# Altium PCB fscv8ch.PCBDOC
Units mil, origin at the board's own origin, x right, y up, seen from the top; angles counter-clockwise.
Board outline 6000 x 4000 mil, 3 copper layers (Top Layer, MidLayer1, Bottom Layer); 30 components, 26 nets, 110 pads, 52 vias.
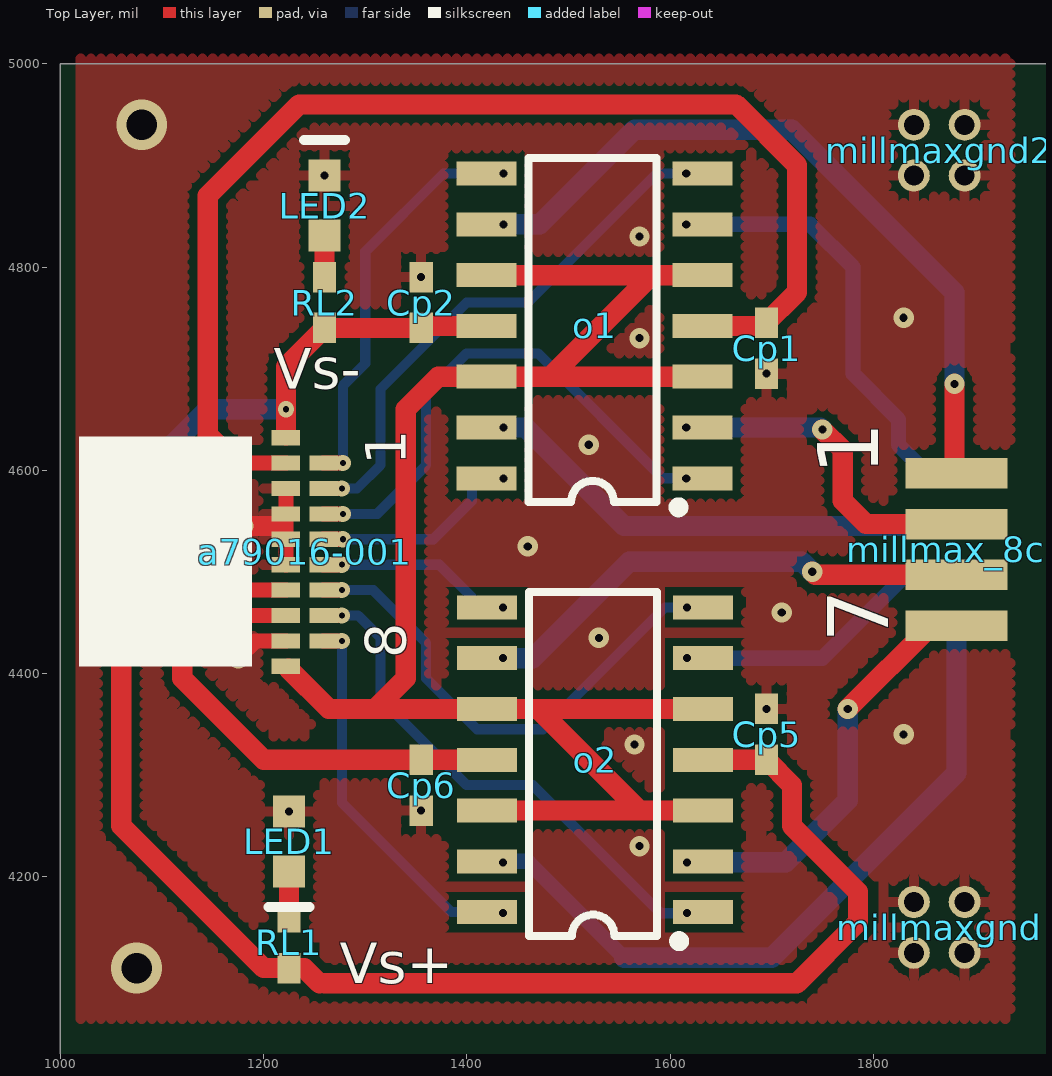
[diagram p0: Top Layer view]
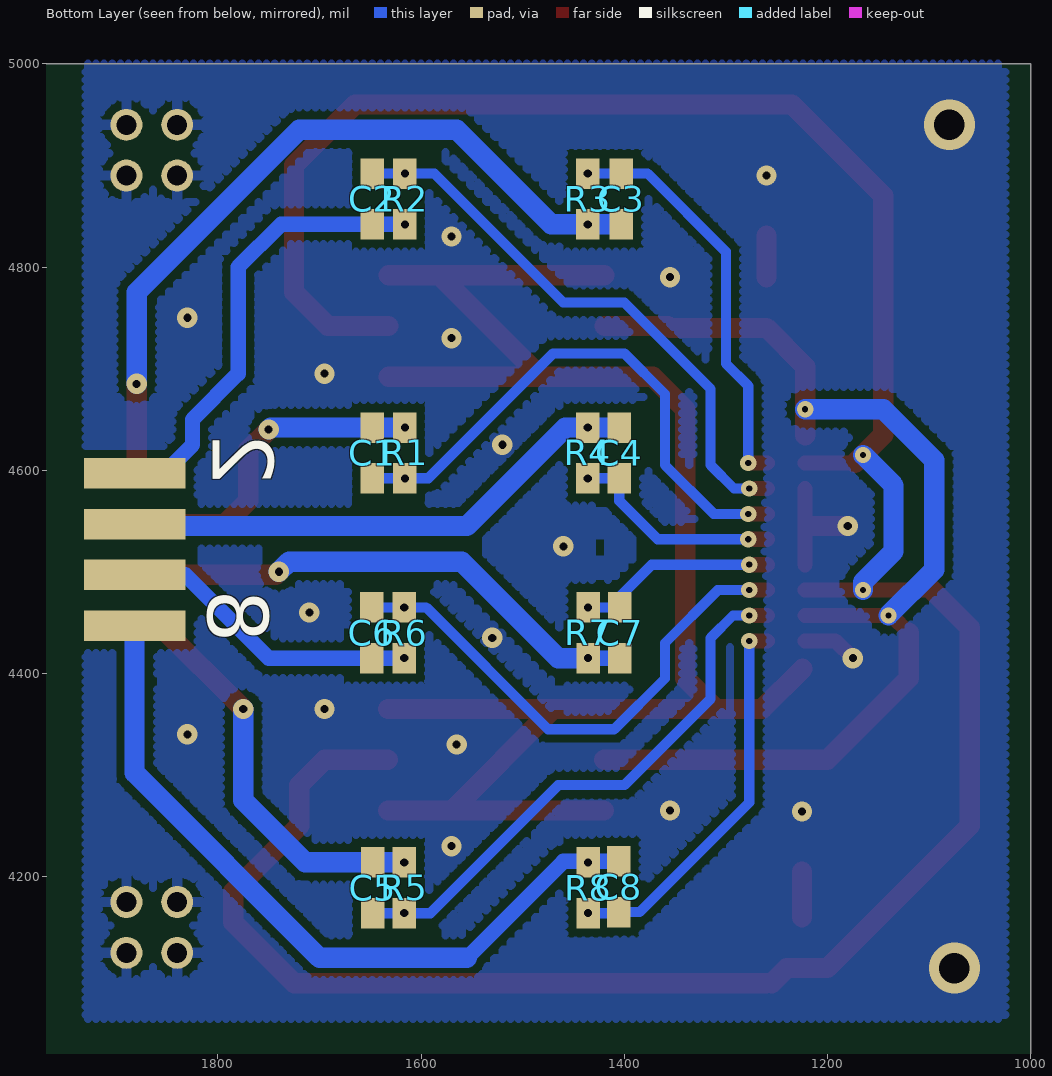
[diagram p1: Bottom Layer view, seen from below]

## Layer stack, top to bottom
Top Layer: signal copper 1.4
Dielectric: core 12.6, FR-4, Dk 4.8
MidLayer1: signal copper 1.4
Dielectric: prepreg 12.6, FR-4, Dk 4.8
Bottom Layer: signal copper 1.4

## Board outline
1000,1000 7000,1000 7000,5000 1000,5000

## Design rules (kind name [scope] priority, off if disabled: settings)
Clearance [All] p1: gap=8
ComponentClearance [All] p1: gap=10 collisioncheckmode=0
HoleSize [All] p1: absolutevalues=TRUE maxlimit=100 minlimit=6 maxpercent=80.000 minpercent=20.000
PolygonConnect [All] p1: connectstyle=Relief reliefconductorwidth=10 reliefentries=4 polygonreliefangle="90 Angle"
RoutingLayers [All] p1: top layer=Horizontal mid layer 1="Not Used" bottom layer=Vertical
RoutingVias [All] p1: holewidth=28 width=50 viastyle="Through Hole" minholewidth=28 minwidth=50 maxholewidth=28 maxwidth=50
SolderMaskExpansion [All] p1: expansion=4
TestPointUsage [All] p1: valid=0 allowmultiple=FALSE
Testpoint [All] p1: side=15 testpointundercomponent=TRUE minsize=40 maxsize=100 preferedsize=60 minholesize=0 maxholesize=40 preferedholesize=32 testpointgrid=1 style=1023 order=-539222988
Width [All] p1: maxlimit=30 minlimit=10 preferedwidth=10 toplayer_prefwidth=20 midlayer1_maxwidth=10 bottomlayer_prefwidth=20 minimp=50.000000 maximp=50.000000 favimp=50.000000
15 further rules are at their usual default settings.

## Components (designator, comment, footprint, x,y, rotation, side; value= is the part's Value field where it differs from the comment)
a79016-001 "a79016-001" A79016-001_finalnovias 1222,4407 r0 top
C1 "Cap" 0402 1648,4642 r270 bottom
C2 "Cap" 0402 1648,4842 r90 bottom
C3 "Cap" 0402 1403,4842 r90 bottom
C4 "Cap" 0402 1405,4642 r270 bottom
C5 "Cap" 0402 1647.6,4214 r270 bottom
C6 "Cap" 0402 1648.6,4415 r90 bottom
C7 "Cap" 0402 1404.6,4415 r90 bottom
C8 "Cap" 0402 1405.6,4215 r270 bottom
Cp1 "Cap" 0402 1695,4695 r90 top
Cp2 "Cap" 0402 1355,4790 r270 top
Cp5 "Cap" 0402 1695,4365 r270 top
Cp6 "Cap" 0402 1355,4265 r90 top
LED1 "LED1" LED_smd 1225,4205 r90 top
LED2 "LED1" LED_smd 1260,4890 r270 top
millmax_8ch "MILLMAX_8CH" "millmax833-d -8ch" 1882,4447 r0 top
millmaxgnd "MILLMAXGND" millmax833-43-008-20-001000gnd 1840,4175 r0 top
millmaxgnd2 "MILLMAXGND" millmax833-43-008-20-001000gnd 1840,4940 r0 top
o1 "TLC274ACD" SO-G14 1632,4592 r90 top
o2 "TLC274ACD" SO-G14 1632.6,4165 r90 top
R1 "Res Semi" 0402 1616,4642 r270 bottom
R2 "Res Semi" 0402 1616,4842 r90 bottom
R3 "Res Semi" 0402 1436,4842 r90 bottom
R4 "Res Semi" 0402 1436,4642 r270 bottom
R5 "Res Semi" 0402 1616.6,4214 r270 bottom
R6 "Res Semi" 0402 1616.6,4415 r90 bottom
R7 "Res Semi" 0402 1435.6,4415 r90 bottom
R8 "Res Semi" 0402 1435.6,4214 r270 bottom
RL1 "Res1" 0402 1225,4160 r270 top
RL2 "Res1" 0402 1260,4740 r90 top

## Footprints (in the part's own frame and the unit in brackets; to place one, negate y for a bottom-side part, rotate by r counter-clockwise, add the part's x,y. Pads: shape width x height; smd on the part's side, far side on the other; paste and mask are expansions set on the pad)
0402 [mil]
  rect 30x23 smd: 1(0,0) 2(50,0)
A79016-001_finalnovias [mil]
  rect 28x15 smd: 0(0,0) 1(0,25) 2(0,50) 3(0,75) 4(0,100) 5(0,125) 6(0,150) 7(0,175) 8(0,200) 9(0,225) 10(37,25) 11(37,50) 12(37,75) 13(37,100) 14(37,125) 15(37,150) 16(37,175) 17(37,200)
  silkscreen extent -203,0 -33,226
LED_smd [mm] "LITE-ON0603"
  rect 0.8x0.8 smd: 1(0,0) 2(1.5,0)
  silkscreen extent -0.89,-0.51 -0.89,0.51
millmax833-43-008-20-001000gnd [mm]
  round 0.8 hole 0.5: 1(0,0) 2(1.27,0) 3(0,-1.27) 4(1.27,-1.27)
"millmax833-d -8ch" [mil]
  rect 100x30 smd: 1(0,150) 3(0,100) 5(0,50) 7(0,0)
  rect 100x30 smd far side: 2(0,150) 4(0,100) 6(0,50) 8(0,0)
SO-G14 [mm]
  rect 0.6x1.5 smd: 1(0,0) 2(1.27,0) 3(2.54,0) 4(3.81,0) 5(5.08,0) 6(6.35,0) 7(7.62,0) 8(7.62,5.4) 9(6.35,5.4) 10(5.08,5.4) 11(3.81,5.4) 12(2.54,5.4) 13(1.27,5.4) 14(0,5.4)
  silkscreen extent -0.85,0.47 8,4.35

## Part data
C1 C2 C3 C4 C5 C6 C7 C8 Cp1 Cp2 Cp5 Cp6: "Capacitor"
LED1 LED2: "Typical RED GaAs LED"
o1 o2: "LinCMOS Precision Quad Operational Amplifier"
R1 R2 R3 R4 R5 R6 R7 R8: "Semiconductor Resistor"
RL1 RL2: "Resistor"

## Via types
v1: diameter 20, hole 8, Top Layer to Bottom Layer, 38 vias
v2: diameter 16, hole 6, Top Layer to Bottom Layer, 12 vias
v3: diameter 50, hole 30, Top Layer to Bottom Layer, 2 vias

## Nets (pads, with @x,y where several pads share a name; then routed paths per layer and width w, separated by ;. In a path a pad name is that pad's centre, name@x,y a point inside that pad or via, vN(x,y) a via of type N, cw(c..) or ccw(c..) an arc to the next point about the centre after c; other vN are vias at no path point)
GND: a79016-001.1 a79016-001.4 a79016-001.5 a79016-001.6 a79016-001.7 Cp1.1 Cp2.1 Cp5.1 Cp6.1 LED1.2 LED2.1 millmaxgnd2.1 millmaxgnd2.2 millmaxgnd2.3 millmaxgnd2.4 millmaxgnd.1 millmaxgnd.2 millmaxgnd.3 millmaxgnd.4 | length 164
  Top Layer w15: v1(1175,4415) 1192,4432 a79016-001.1 ; a79016-001.4 a79016-001.7
  Top Layer w20: v1(1180,4545) 1215,4545
  other v1: 1570,4230 1225,4264.06 1355,4265 1565,4330 1830,4340 1695,4365 1530,4435 1710,4460 1460,4525 1520,4625 1695,4695 1570,4730 1830,4750 1355,4790 1570,4830 1260,4890
  other v3: 1075,4110 1080,4940
I0: C3.1 millmax_8ch.1 o1.9 R3.1 | length 760.6
  Top Layer w20: v1(1880,4685) 1880,4599 millmax_8ch.1
  Bottom Layer w20: C3.1 1472,4842 1565,4935 1720,4935 1880,4775 v1(1880,4685)
  other v1: 1436,4842
I1: C2.1 millmax_8ch.2 o1.6 R2.1 | length 443.6
  Bottom Layer w15: v1(1616,4842) 1738,4842 1780,4800 1780,4695 1825,4650 1825,4625 1853,4597 millmax_8ch.2
I2: C1.1 millmax_8ch.3 o1.2 R1.1 | length 334.6
  Top Layer w20: v1(1750,4640) 1770,4620 1770,4570 1793,4547 millmax_8ch.3
  Bottom Layer w20: v1(1616,4642) 1748,4642 v1(1750,4640)
I3: C4.1 millmax_8ch.4 o1.13 R4.1 | length 522.2
  Bottom Layer w15: millmax_8ch.4@1879,4550 millmax_8ch.4
  Bottom Layer w20: C4.1 1458,4642 1555,4545 1880,4545 millmax_8ch.4
  other v1: 1436,4642
I4: C7.1 millmax_8ch.5 o2.9 R7.1 | length 522.1
  Top Layer w20: v1(1740,4500) 1743,4497 millmax_8ch.5
  Bottom Layer w15: C7.1 v1(1435.6,4415)
  Bottom Layer w20: v1(1435.6,4415) 1465,4415 1560,4510 1730,4510 v1(1740,4500)
I5: C6.1 millmax_8ch.6 o2.6 R6.1 | length 299.4
  Bottom Layer w15: v1(1616.6,4415) 1750,4415 1832,4497 millmax_8ch.6
I6: C5.1 millmax_8ch.7 o2.2 R5.1 | length 414.6
  Top Layer w20: v1(1775,4365) 1857,4447 millmax_8ch.7
  Bottom Layer w20: v1(1616.6,4214) 1714,4214 1775,4275 v1(1775,4365)
I7: C8.1 millmax_8ch.8 o2.13 R8.1 | length 758.6
  Bottom Layer w12: R8.1@1434.6,4215 v1(1435.6,4214) 1456.6,4214
  Bottom Layer w15: C8.1 1460,4215 1555,4120
  Bottom Layer w20: 1555,4120 1700,4120 1882,4302 millmax_8ch.8
NetLED1_1: LED1.1 RL1.1 | length 45
  Top Layer w20: RL1.1 LED1.1
NetLED2_2: LED2.2 RL2.2 | length 40.9
  Top Layer w20: RL2.2 LED2.2
Neto1_4: 
Neto1_4: 
Neto1_11: 
Neto1_11: 
V0: a79016-001.17 C3.2 o1.8 R3.2 | length 404
  Top Layer w15: a79016-001.17 v2(1278,4607)
  Bottom Layer w10: v2(1278,4607) 1278,4683 1300,4705 1300,4815 1377,4892 v1(1436,4892)
V1: a79016-001.16 C2.2 o1.7 R2.2 | length 561.3
  Top Layer w15: a79016-001.16 v2(1277,4582)
  Bottom Layer w10: v2(1277,4582) 1292,4582 1315,4605 1315,4680 1400,4765 1460,4765 1587,4892 C2.2
  other v1: 1616,4892
V2: a79016-001.15 C1.2 o1.1 R1.2 | length 546.4
  Top Layer w15: a79016-001.15 v2(1278,4557)
  Bottom Layer w10: v2(1278,4557) 1312,4557 1360,4605 1360,4675 1400,4715 1470,4715 1593,4592 C1.2
  other v1: 1616,4592
V3: a79016-001.14 C4.2 o1.14 R4.2 | length 214.7
  Top Layer w15: a79016-001.14 v2(1278,4532)
  Bottom Layer w10: v2(1278,4532) 1367,4532 1405,4570 C4.2 v1(1436,4592)
V4: a79016-001.13 C7.2 o2.8 R7.2 | length 200.1
  Top Layer w15: a79016-001.13 v2(1277,4507)
  Bottom Layer w10: v2(1277,4507) 1373,4507 1404.6,4475.4 C7.2 v1(1435.6,4465)
V5: a79016-001.12 C6.2 o2.7 R6.2 | length 516.6
  Top Layer w15: a79016-001.12 v2(1277,4482)
  Bottom Layer w10: v2(1277,4482) 1308,4482 1360,4430 1360,4395 1410,4345 1475,4345 1595,4465 C6.2
  other v1: 1616.6,4465
V6: a79016-001.11 C5.2 o2.1 R5.2 | length 545.1
  Top Layer w15: a79016-001.11 v2(1277,4457)
  Bottom Layer w10: v2(1277,4457) 1293,4457 1315,4435 1315,4375 1400,4290 1465,4290 1591,4164 C5.2
  other v1: 1616.6,4164
V7: a79016-001.10 C8.2 o2.14 R8.2 | length 380.7
  Top Layer w15: a79016-001.10 v2(1277,4432)
  Bottom Layer w10: v2(1277,4432) 1277,4273 1385,4165 C8.2 1406.6,4164 v1(1435.6,4164)
VCC+: a79016-001.3 a79016-001.8 Cp1.2 Cp5.2 o1.4 o2.4 RL1.2 | length 2796.3
  Top Layer w15: 1097,4482 a79016-001.3 ; 1173,4607 a79016-001.8
  Top Layer w20: 1097,4482 1060,4445 1060,4250 1200,4110 1240,4110 1255,4095 ; 1173,4607 1145,4635 1145,4870 1235,4960 1665,4960 1725,4900 1725,4775 1692,4742 o1.4 ; 1260,4095 1725,4095 1785,4155 1785,4185 1720,4250 1720,4290 Cp5.2 o2.4
  Bottom Layer w20: v2(1165,4482) 1165,4490 1135,4520 1135,4585 v2(1165,4615)
VCC-: a79016-001.2 a79016-001.9 Cp2.2 Cp6.2 o1.11 o2.11 RL2.1 | length 1088
  Top Layer w15: 1120,4440 1137,4457 a79016-001.2
  Top Layer w20: 1120,4440 1120,4395 1200,4315 o2.11 ; a79016-001.9@1222,4634.5 1222,4702 RL2.1 Cp2.2 1357,4742 o1.11
  Bottom Layer w20: v2(1140,4457) 1095,4502 1095,4610 1145,4660 v2(1222,4660)
VR: a79016-001.0 o1.3 o1.5 o1.10 o1.12 o2.3 o2.5 o2.10 o2.12 | length 1745.2
  Top Layer w20: a79016-001.0@1224.5,4404.5 1264,4365 o2.5 ; 1310,4365 1340,4395 1340,4660 1372,4692 o1.3 ; o1.10 o1.5 ; o2.12 o2.3 ; 1470,4365 1570,4265 ; 1482,4692 1582,4792

## Polygon pours and split planes (outlines as drawn)
GND on Top Layer (hatched 90Degree grid 0 track 10, remove dead copper): 1020,5005 1935,5005 1935,4060 1020,4060
GND on Bottom Layer (hatched 90Degree grid 0 track 8, remove dead copper): 1025,5000 1930,5000 1930,4060 1025,4060

## Silkscreen, mask and mechanical layers (free items; w line width, h text height)
Top Overlay:
  text "Vs-" at 1210,4680 h40
  text "1" at 1340,4605 h40 r90
  text "1" at 1805,4595 h60 r90
  text "7" at 1815,4430 h60 r90
  text "8" at 1340,4415 h40 r90
  text "Vs+" at 1275,4095 h40
Bottom Overlay:
  text "2" at 1805,4585 h60 r90
  text "8" at 1810,4430 h60 r90
Mechanical 1:
  lines w30: 1020,4055 1950,4055 1950,5005 1020,5005 1020,4055